# Altium PCB PCB1.PcbDoc
Units mil, origin at the board's own origin, x right, y up, seen from the top; angles counter-clockwise.
Board outline 1740 x 3157.5 mil, 2 copper layers (Top Layer, Bottom Layer); 17 components, 13 nets, 76 pads, 2 vias.
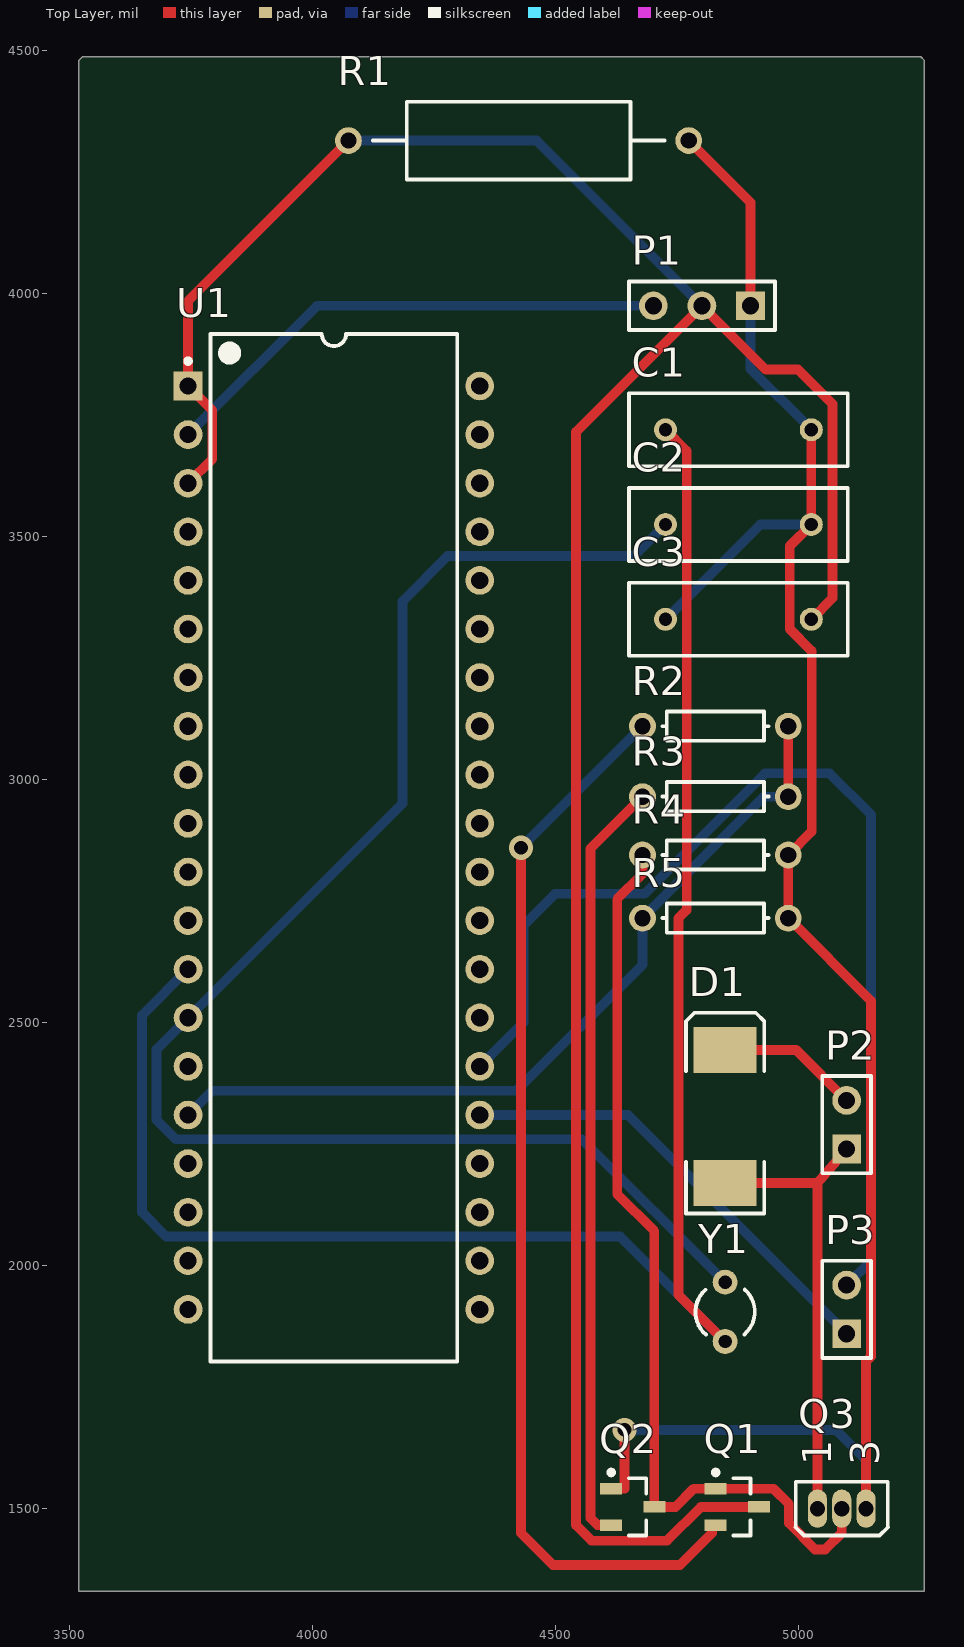
[diagram p0: Top Layer view]
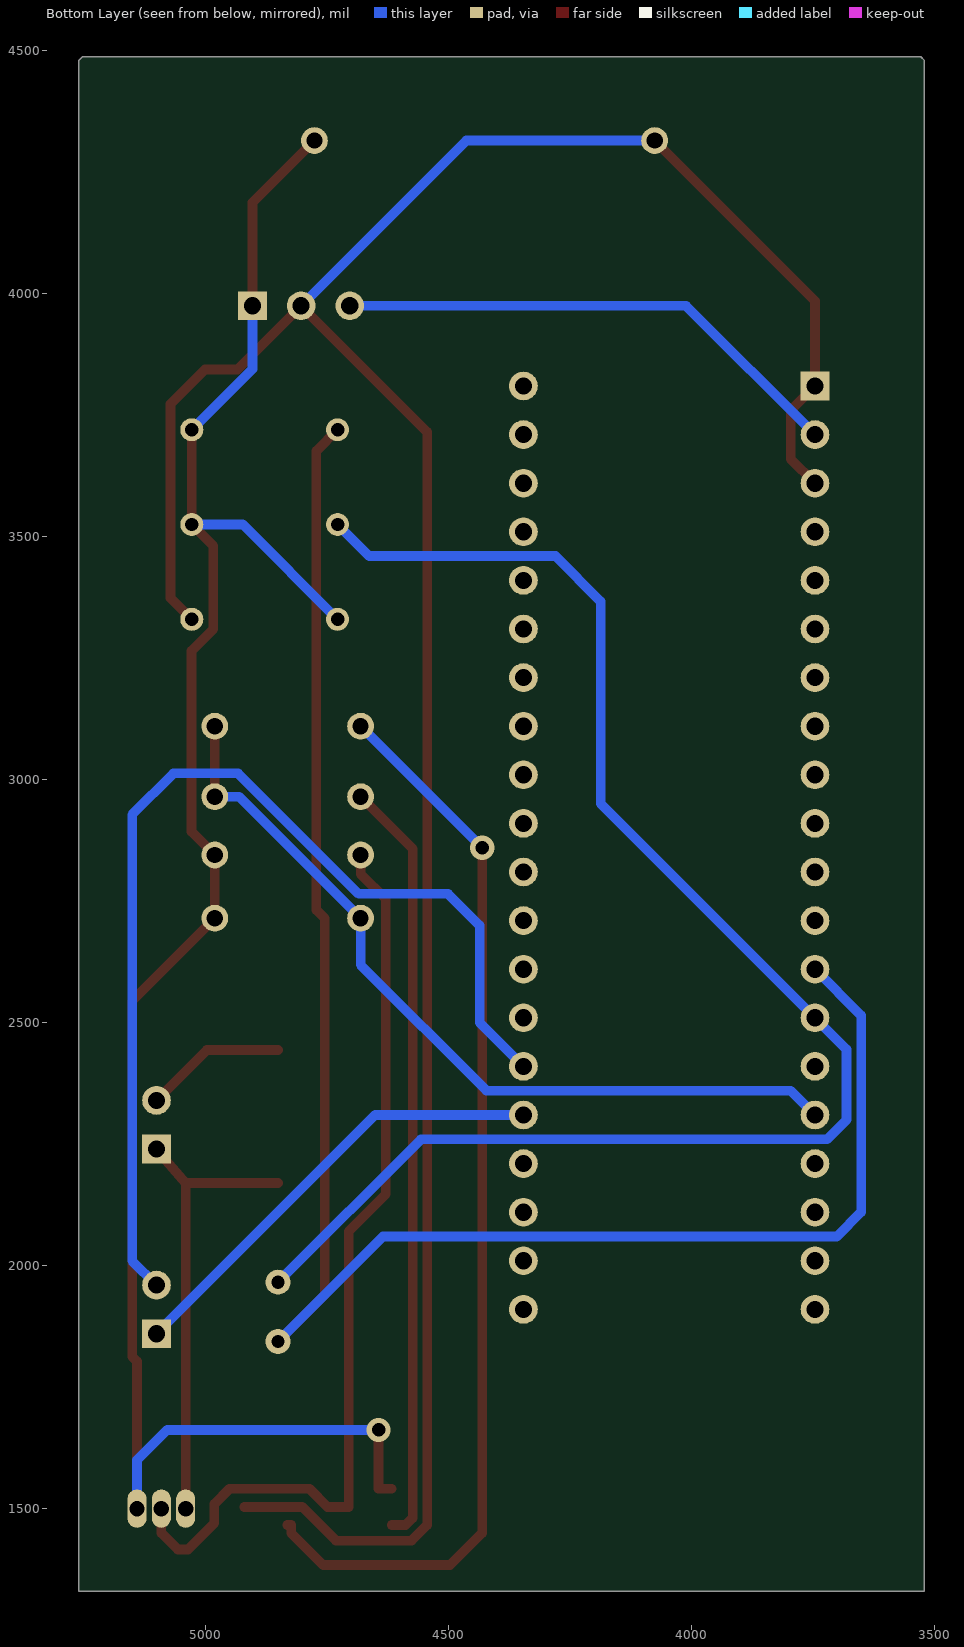
[diagram p1: Bottom Layer view, seen from below]

## Layer stack, top to bottom
Top Solder: solder mask 0.4, Solder Resist, Dk 3.5
Top Layer: signal copper 1.4
Dielectric 1: dielectric 12.6, FR-4, Dk 4.8
Bottom Layer: signal copper 1.4
Bottom Solder: solder mask 0.4, Solder Resist, Dk 3.5

## Board outline
3520,1330 3520,4480 3527.5,4487.5 5252.5,4487.5 5260,4480 5260,1330

## Design rules (kind name [scope] priority, off if disabled: settings)
Clearance [All] p1: gap=10 ignorepadtopadclearanceinfootprint=FALSE except(0: Arc-Hole Track-Hole SMDPad-Hole THPad-Hole Via-Hole Fill-Hole Poly-Hole Region-Hole Text-Hole)
PolygonConnect [All] p1: connectstyle=Relief reliefconductorwidth=10 reliefentries=4 polygonreliefangle="90 Angle" airgapwidth=10
RoutingVias [All] p1: holewidth=28 width=50 viastyle="Through Hole" minholewidth=28 minwidth=50 maxholewidth=28 maxwidth=50
SolderMaskExpansion [All] p1: expansion=4 istentingtop=FALSE
Width [All] p1: maxlimit=30 minlimit=15 preferedwidth=20 minimp=50.000000 maximp=50.000000 favimp=50.000000
30 further rules are at their usual default settings.

## Components (designator, comment, footprint, x,y, rotation, side; value= is the part's Value field where it differs from the comment)
C1 "Cap" RAD-0.3 4877.38,3720 r180 top value=22u
C2 "Cap" RAD-0.3 4877.38,3525 r180 top value=22u
C3 "Cap" RAD-0.3 4877.38,3330 r180 top value=100nF
D1 "Diode" SMC 4850,2306.81 r90 top
P1 "LM35" HDR1X3 4902.38,3975 r180 top
P2 "Motor DC" HDR1X2 5100,2240 r90 top
P3 "UART" HDR1X2 5100,1860 r90 top
Q1 "PNP" SOT-23B_N 4875,1503.54 r0 top
Q2 "PNP" SOT-23B_N 4660,1503.54 r0 top
Q3 "MOSFET-N" E3 5090,1500 r90 top
R1 "Res Adj1" AXIAL-0.7 4425,4315 r180 top value=1K
R2 "Res1" AXIAL-0.3 4830,3110 r180 top value=33R
R3 "Res1" AXIAL-0.3 4830,2965 r180 top value=33R
R4 "Res1" AXIAL-0.3 4830,2845 r180 top value=4.7k
R5 "Res1" AXIAL-0.3 4830,2715 r180 top value=10k
U1 "PIC16F877A-I/P" PDIP600-P40 4045,2860 r0 top
Y1 "XTAL" R38 4850,1905 r0 top

## Footprints (in the part's own frame and the unit in brackets; to place one, negate y for a bottom-side part, rotate by r counter-clockwise, add the part's x,y. Pads: shape width x height; smd on the part's side, far side on the other; paste and mask are expansions set on the pad)
AXIAL-0.3 [mm] "Axial Device, Thru-Hole; 2 Leads; 0.3 in Pin Spacing"
  round 1.4 hole 0.85: 1(-3.81,0) 2(3.81,0)
  silkscreen extent -2.77,-0.76 2.77,0.76
AXIAL-0.7 [mm] "Axial Device, Thru-Hole; 2 Leads; 0.7 in Pin Spacing"
  round 1.4 hole 0.85: 1(-8.89,0) 2(8.89,0)
  silkscreen extent -7.62,-2.03 7.62,2.03
E3 [mm] "TO, Flat Index; 3 In-Line, Axial Leads; Body Dia. 4.6mm; Lead Dia. 0.5 mm (max)"
  oval 2x1 hole 0.8: 1(0,1.27) 2(0,0) 3(0,-1.27)
  silkscreen extent -1.41,-2.41 1.41,2.41
HDR1X2 [mm] "Connector; Header; 2 Position"
  rect 1.5x1.5 hole 0.9: 1(0,0)
  round 1.5 hole 0.9: 2(2.54,0)
  silkscreen extent -1.27,-1.27 3.81,1.27
HDR1X3 [mm] "Connector; Header; 3 Position"
  rect 1.5x1.5 hole 0.9: 1(0,0)
  round 1.5 hole 0.9: 2(2.54,0) 3(5.08,0)
  silkscreen extent -1.27,-1.27 6.35,1.27
PDIP600-P40 [mm] "DIP, 40-Pin, Row Spacing 15.24 mm, Pitch 2.54 mm"
  rect 1.5x1.5 hole 0.9: 1(-7.62,24.13)
  round 1.5 hole 0.9: 2(-7.62,21.59) 3(-7.62,19.05) 4(-7.62,16.51) 5(-7.62,13.97) 6(-7.62,11.43) 7(-7.62,8.89) 8(-7.62,6.35) 9(-7.62,3.81) 10(-7.62,1.27) 11(-7.62,-1.27) 12(-7.62,-3.81) 13(-7.62,-6.35) 14(-7.62,-8.89) 15(-7.62,-11.43) 16(-7.62,-13.97) 17(-7.62,-16.51) 18(-7.62,-19.05) 19(-7.62,-21.59) 20(-7.62,-24.13) 21(7.62,-24.13) 22(7.62,-21.59) 23(7.62,-19.05) 24(7.62,-16.51) 25(7.62,-13.97) 26(7.62,-11.43) 27(7.62,-8.89) 28(7.62,-6.35) 29(7.62,-3.81) 30(7.62,-1.27) 31(7.62,1.27) 32(7.62,3.81) 33(7.62,6.35) 34(7.62,8.89) 35(7.62,11.43) 36(7.62,13.97) 37(7.62,16.51) 38(7.62,19.05) 39(7.62,21.59) 40(7.62,24.13)
  silkscreen extent -7.74,-26.85 6.45,26.85, body extent -7.3,-26.85 7.3,26.85, height 6.35
R38 [mm] "Crystal, Thru-Hole; 2 Leads; Body 3.1 x 8.2 mm (Dia.xH)"
  round 1.3 hole 0.7: 1(0,1.55) 2(0,-1.55)
  silkscreen extent -1.55,-1.19 1.55,1.17
RAD-0.3 [mm] "Radial Cap, Thru-Hole; 2 Leads; 0.3 in Pin Spacing"
  round 1.2 hole 0.7: 1(-3.81,0) 2(3.81,0)
  silkscreen extent -5.71,-1.91 5.71,1.91
SMC [mm] "DO-214-AB/SMC; 2 C-Bend Leads; Body 7.9 x 5.9 mm, inc. leads (LxW)"
  rect 2.4x3.3 smd: 1(-3.475,0) 2(3.475,0)
  silkscreen extent -5.07,-2.05 5.43,2.06
SOT-23B_N [mm] "SOT23, 3-Leads, Body 2.9x1.3mm, Pitch 0.95mm, Lead Span 2.4mm, IPC Medium Density"
  rect 1.15x0.6 smd: 1(-1.125,0.95) 2(-1.125,-0.95) 3(1.125,0)
  silkscreen extent -1.25,-1.5 0.7,1.92, body extent -0.7,-1.5 0.7,1.5, height 1.14

## Part data
C1 C2 C3: "Capacitor", LatestRevisionDate=17-Jul-2002, LatestRevisionNote="Re-released for DXP Platform.", PackageDescription="Radial Cap, Thru-Hole; 2 Leads; 0.3 in Pin Spacing", PackageReference=RAD-0.3, Published=8-Jun-2000, Publisher="Altium Limited"
D1: "Default Diode", Code_JEDEC=DO-214-AB, LatestRevisionDate=17-Jul-2002, LatestRevisionNote="Re-released for DXP Platform.", PackageDescription="DO-214-AB/SMC; 2 C-Bend Leads; Body 7.9 x 5.9 mm, inc. leads (LxW)", PackageReference=SMC, PackageVersion=Sep-1996, Published=8-Jun-2000, Publisher="Altium Limited"
P1: library part "Header 3", "Header, 3-Pin", LatestRevisionDate=17-Jul-2002, LatestRevisionNote="Re-released for DXP Platform.", Publisher="Altium Limited"
P2 P3: library part "Header 2", "Header, 2-Pin", LatestRevisionDate=17-Jul-2002, LatestRevisionNote="Re-released for DXP Platform.", Publisher="Altium Limited"
Q1 Q2: "PNP Bipolar Transistor", LatestRevisionDate=29-May-2009, LatestRevisionNote="IPC-7351 Footprint Added.", PackageDescription="3-Pin SOT-23 Package 0.95 mm Pitch, 2.4 mm Lead Span", PackageReference=SOT-23B, PackageVersion=Aug-1999, Published=8-Jun-2000, Publisher="Altium Limited"
Q3: "N-Channel MOSFET", LatestRevisionDate=17-Jul-2002, LatestRevisionNote="Re-released for DXP Platform.", PackageDescription="TO, Flat Index; 3 In-Line, Axial Leads; Body Dia. 4.6mm; Lead Dia. 0.5 mm (max)", PackageReference=E3, PackageVersion=1995/1996, Published=8-Jun-2000, Publisher="Altium Limited"
R1: "Variable Resistor", LatestRevisionDate=17-Jul-2002, LatestRevisionNote="Re-released for DXP Platform.", PackageDescription="Axial Device, Thru-Hole; 2 Leads; 0.7 in Pin Spacing", PackageReference=AXIAL-0.7, Published=8-Jun-2000, Publisher="Altium Limited", Set Position=0.5
R2 R3 R4 R5: "Resistor", LatestRevisionDate=17-Jul-2002, LatestRevisionNote="Re-released for DXP Platform.", PackageDescription="Axial Device, Thru-Hole; 2 Leads; 0.3 in Pin Spacing", PackageReference=AXIAL-0.3, Published=8-Jun-2000, Publisher="Altium Limited"
U1: library part CMP-0115-00183-1, "Enhanced FLASH Microcontroller, 8K (x14-Bit words) FLASH, 368 Bytes RAM, 40-Pin PDIP, Standard VDD Range, Industrial Temperature", ComponentAvailability="Unknown. Contact manufacturer to determine status.", DatasheetVersion="revB, Oct-2003", PackageDescription="40-Lead Plastic Dual In-Line (P) - 600 mil Body [PDIP]", PackageReference=PDIP600-P40, PackageVersion="revBB, Aug-2009"
Y1: "Crystal Oscillator", LatestRevisionDate=17-Jul-2002, LatestRevisionNote="Re-released for DXP Platform.", PackageDescription="Crystal, Thru-Hole; 2 Leads; Body 3.1 x 8.2 mm (Dia.xH)", PackageReference=R38, Published=8-Jun-2000, Publisher="Altium Limited"

## Via types
v1: diameter 50, hole 28, Top Layer to Bottom Layer, 2 vias

## Nets (pads, with @x,y where several pads share a name; then routed paths per layer and width w, separated by ;. In a path a pad name is that pad's centre, name@x,y a point inside that pad or via, vN(x,y) a via of type N, cw(c..) or ccw(c..) an arc to the next point about the centre after c; other vN are vias at no path point)
+5: C3.1 P1.2 Q1.3 R1.2 U1.1 U1.3 | length 5599.5
  Top Layer w20: U1.3 3795,3660 3795,3760 U1.1 3745,3985 R1.2 ; Q1.3 4800,1503.54 4730.46,1434 4575,1434 4543,1466 4543,3715.62 P1.2 4933.38,3844 5000,3844 5071,3773 5071,3373.62 C3.1
  Bottom Layer w20: R1.2 4462.38,4315 P1.2
+12: D1.2 P2.2 | length 292.9
  Top Layer w20: D1.2 4996.38,2443.62 P2.2
GND: C1.1 C2.1 C3.2 P1.1 Q2.1 Q3.3 R1.1 R4.1 R5.1 | length 4202.8
  Top Layer w20: Q2.1 4643,1540.94 v1(4643,1662) ; R1.1 4902.38,4187.62 P1.1 ; C1.1 C2.1 4983,3480.62 4983,3310 5028,3265 5028,2893 R4.1 R5.1 5150,2545 5150,1813 5140,1803 Q3.3
  Bottom Layer w20: v1(4643,1662) 5078,1662 5140,1600 Q3.3 ; C3.2 4922.38,3525 C2.1 ; P1.1 4902.38,3845 C1.1
NetC1_2: C1.2 U1.13 Y1.2 | length 3790.4
  Top Layer w20: C1.2 4771,3676.38 4771,2732 4754,2715 4754,1939.98 Y1.2
  Bottom Layer w20: U1.13 3650,2515 3650,2110 3700,2060 4633.98,2060 Y1.2
NetC2_2: C2.2 U1.14 Y1.1 | length 3191.8
  Bottom Layer w20: C2.2 4662.38,3460 4279,3460 4186,3367 4186,2951 U1.14 3680,2445 3680,2300 3720,2260 4556.02,2260 Y1.1
NetD1_1: D1.1 P2.1 Q3.1 | length 952.2
  Top Layer w20: D1.1 5040,2170 ; Q3.1 5040,2170 ; P2.1 5040,2170
NetP1_3: P1.3 U1.2 | length 1067.1
  Bottom Layer w20: U1.2 4010,3975 P1.3
NetP3_1: P3.1 U1.25 | length 941.4
  Bottom Layer w20: U1.25 4650,2310 P3.1
NetP3_2: P3.2 U1.26 | length 2195.8
  Bottom Layer w20: U1.26 4435,2500 4435,2700 4500,2765 4684,2765 4932,3013 5065,3013 5150,2928 5150,2010 P3.2
NetQ1_1: Q1.1 Q2.3 Q3.2 R4.2 | length 1935
  Top Layer w20: R4.2 4680,2806 4628,2754 4628,2147.29 4704.29,2071 Q2.3 4748,1503.54 4785.4,1540.94 Q1.1 4950,1540.94 4981,1509.94 4981,1470 5035,1416 5056,1416 5090,1450 Q3.2
NetQ1_2: Q1.2 R2.2 | length 2235.1
  Top Layer w20: v1(4430,2860) 4430,1450 4496,1384 4757,1384 4823,1450 4823,1466.14 Q1.2
  Bottom Layer w20: v1(4430,2860) R2.2
NetQ2_2: Q2.2 R3.2 | length 1577.4
  Top Layer w20: Q2.2 4587.5,1466.14 4573,1480.64 4573,2858 R3.2
NetR2_1: R2.1 R3.1 R5.2 U1.16 | length 1707.5
  Top Layer w20: R3.1 R2.1
  Bottom Layer w20: U1.16 3795,2360 4421,2360 4680,2619 R5.2 4930,2965 R3.1
pads on no net: U1.4 U1.5 U1.6 U1.7 U1.8 U1.9 U1.10 U1.11 U1.12 U1.15 U1.17 U1.18 U1.19 U1.20 U1.21 U1.22 U1.23 U1.24 U1.27 U1.28 U1.29 U1.30 U1.31 U1.32 U1.33 U1.34 U1.35 U1.36 U1.37 U1.38 U1.39 U1.40

## Silkscreen, mask and mechanical layers (free items; w line width, h text height)
Board Outline:
  lines w20: 3520,1330 5260,1330 5260,4480 5252.5,4487.5 3527.5,4487.5 3520,4480 3520,4465 3520,1330

## Text inside footprints (layer, text, board x,y; h text height)
Q3: Top Overlay "1" at 5068.15,1589.57 h59.05 r90; Top Overlay "3" at 5167.28,1589.57 h59.05 r90